# Altium PCB Signal_Integrity_4L.PcbDoc
Units mm, origin at the board's own origin, x right, y up, seen from the top; angles counter-clockwise.
Board outline 110 x 260 mm, 4 copper layers (Top Layer 1, GND1, Signal, Bottom Layer 1), stack 1.586 mm thick; 48 components, 38 nets, 216 pads, 1697 vias.
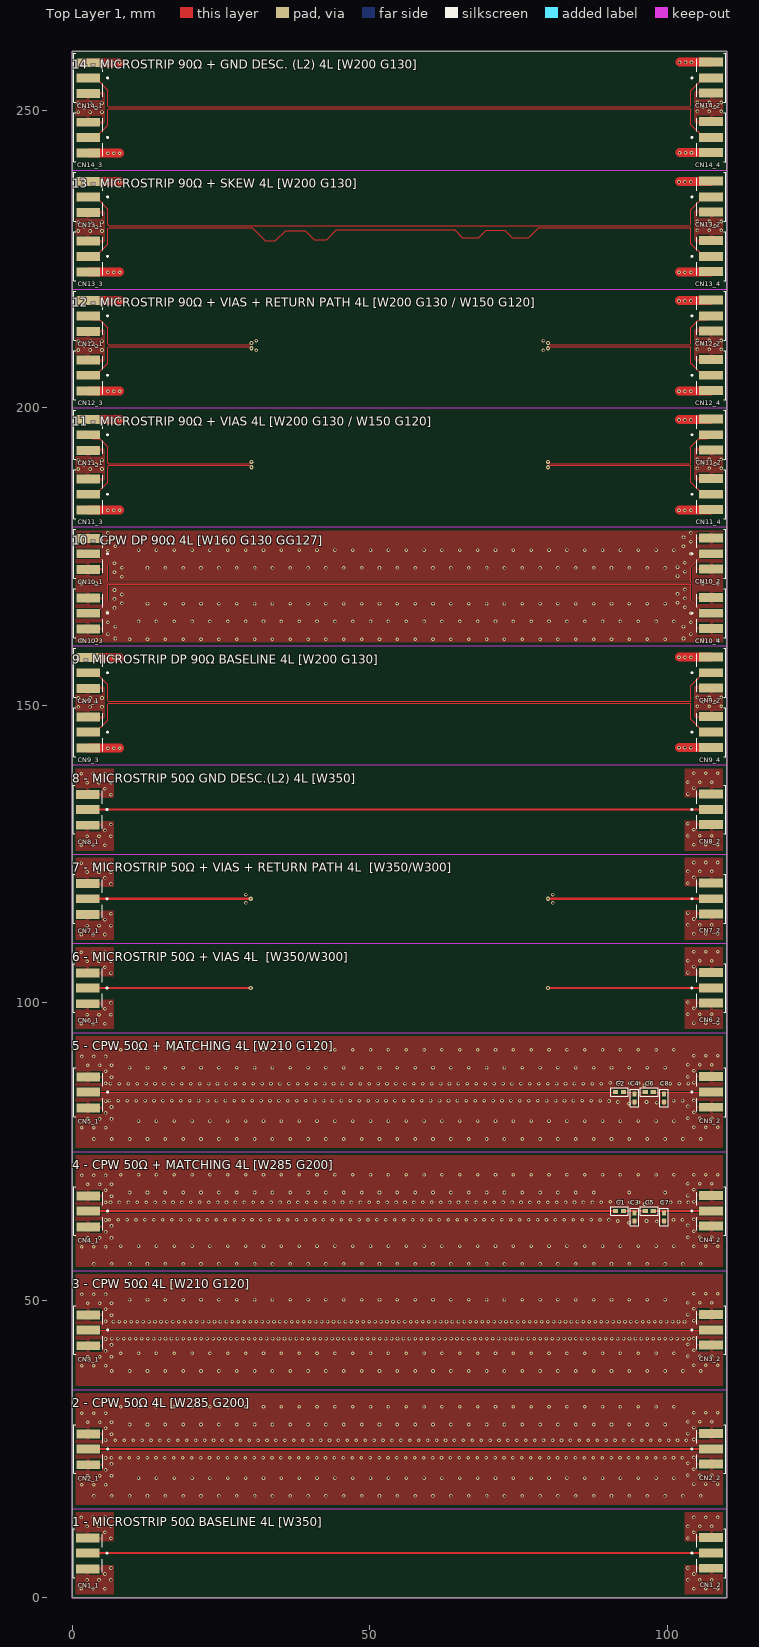
[diagram p0: Top Layer 1 view]
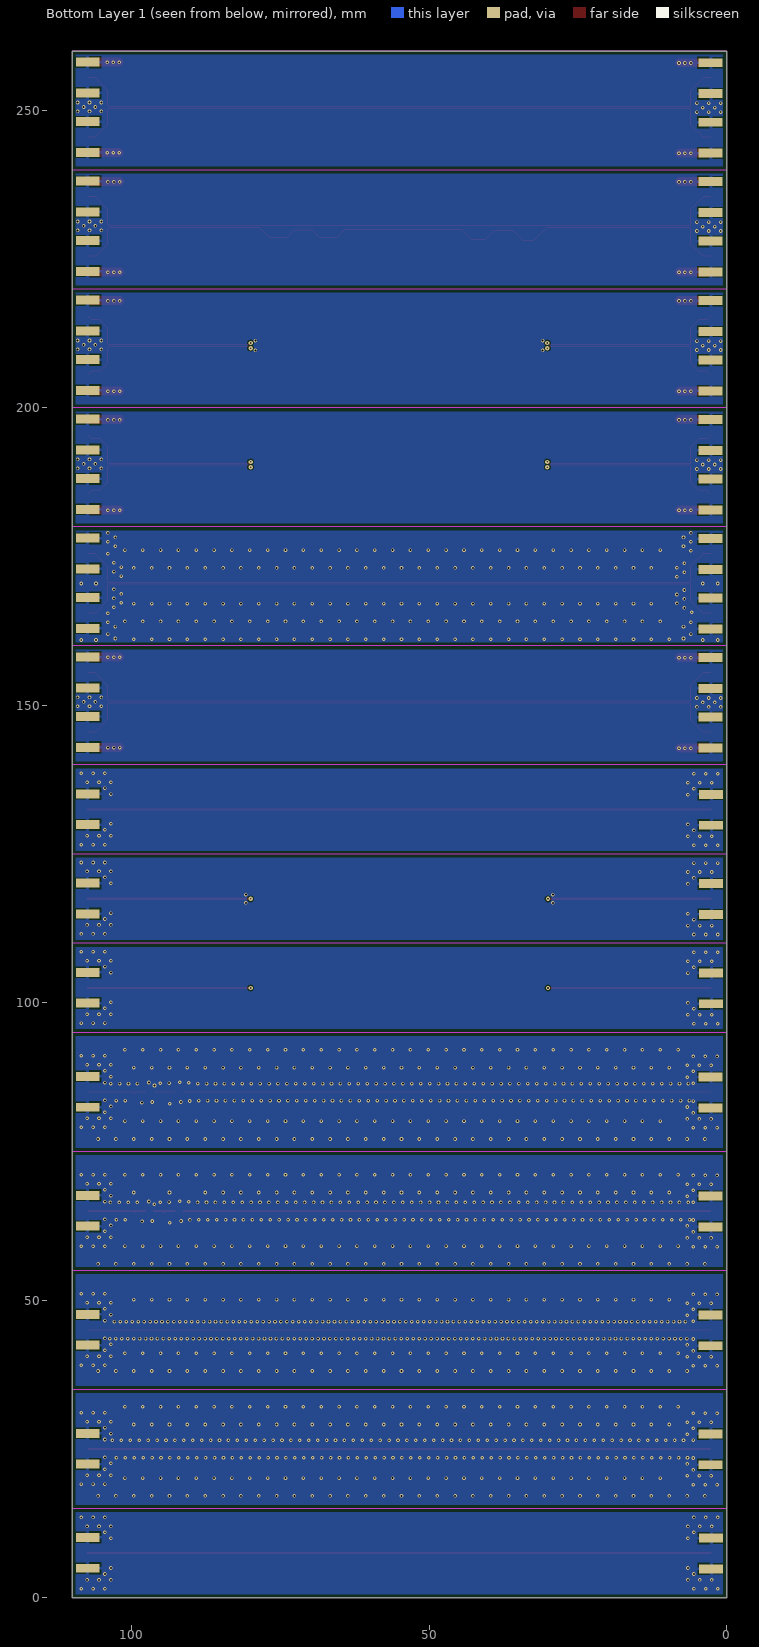
[diagram p1: Bottom Layer 1 view, seen from below]
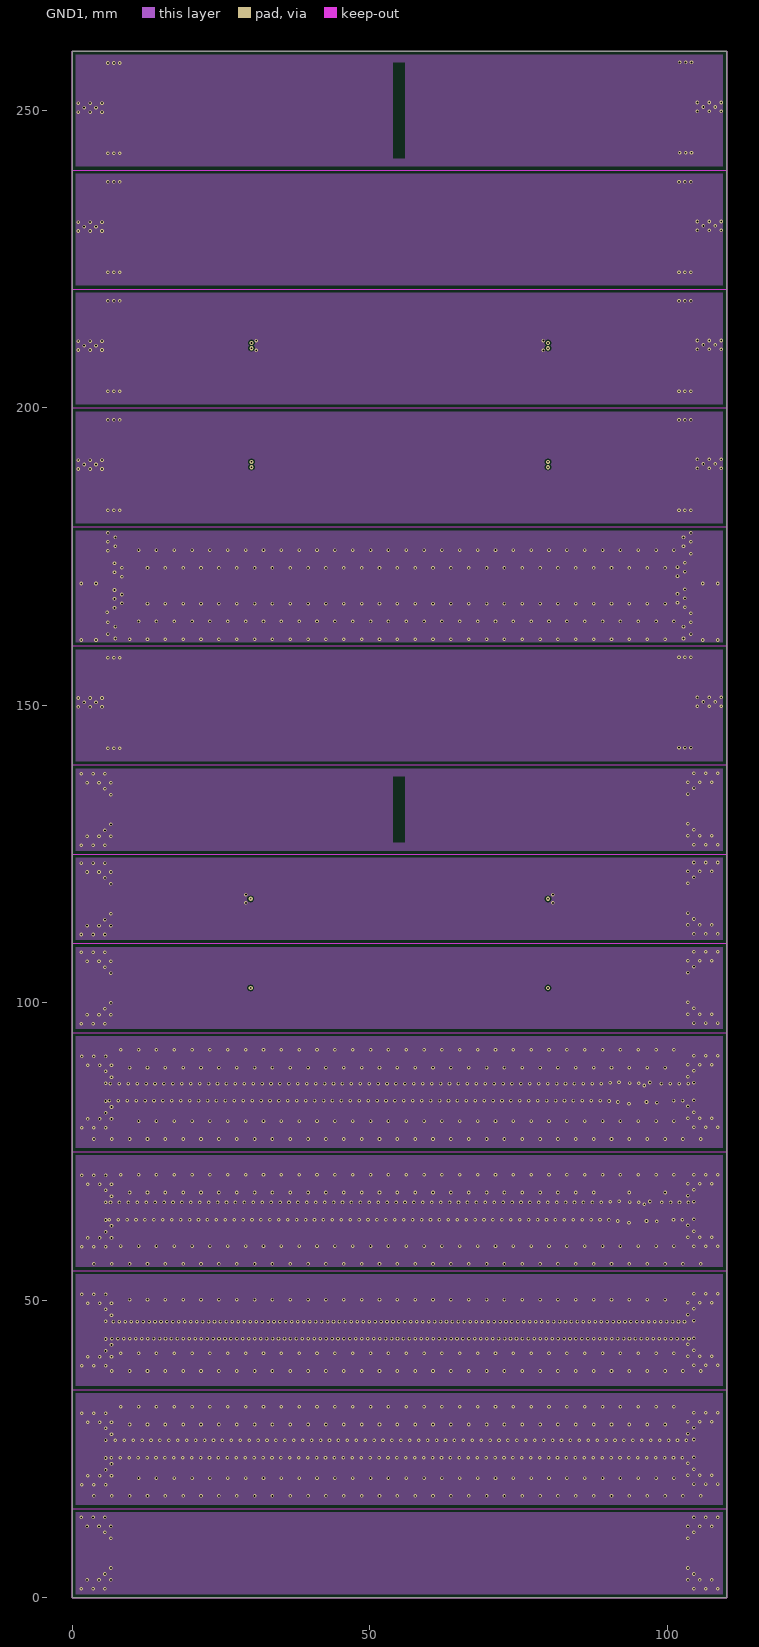
[diagram p2: GND1]
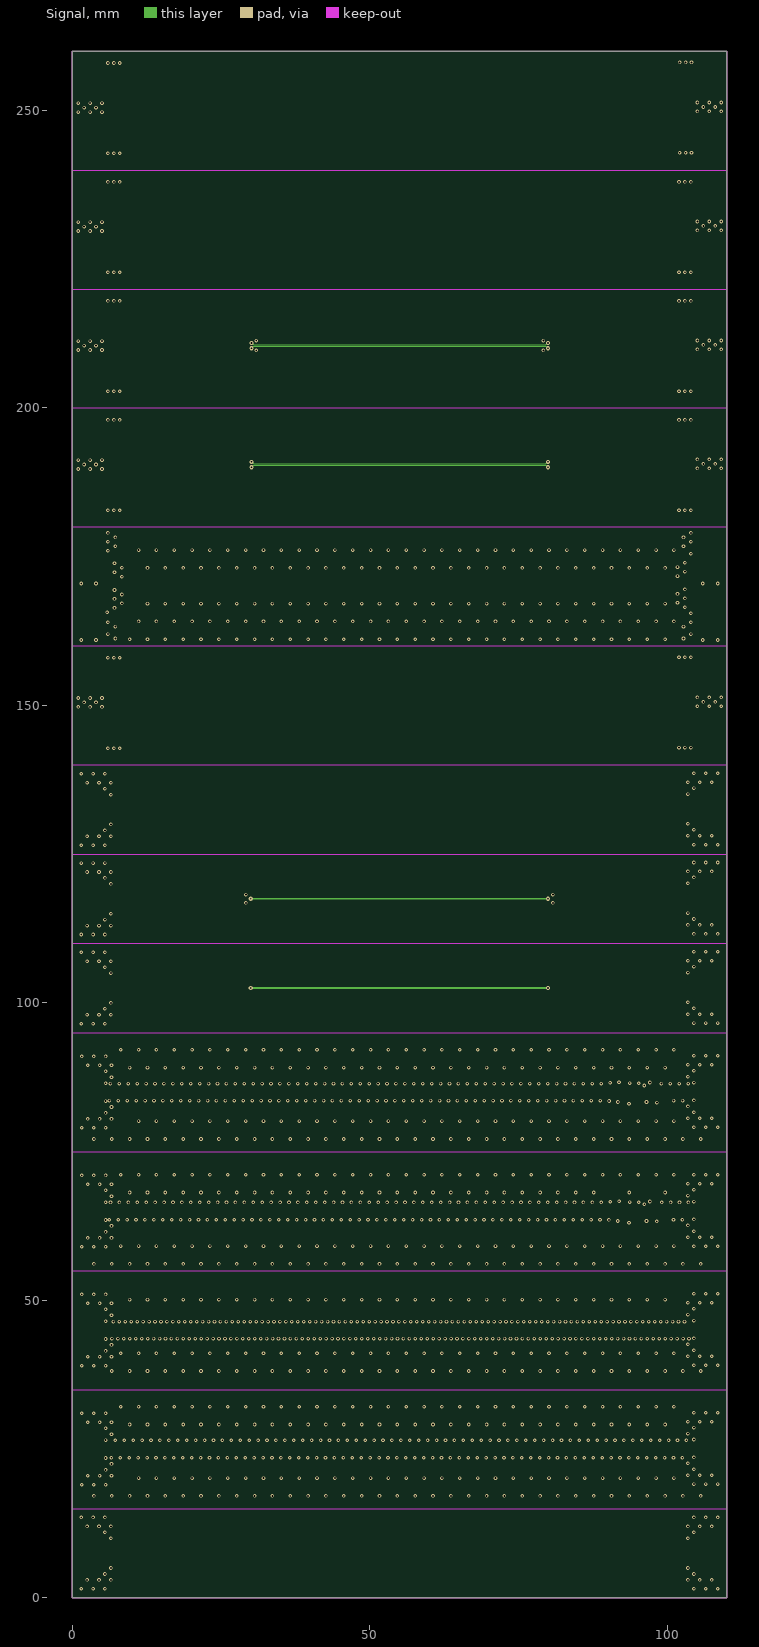
[diagram p3: Signal]
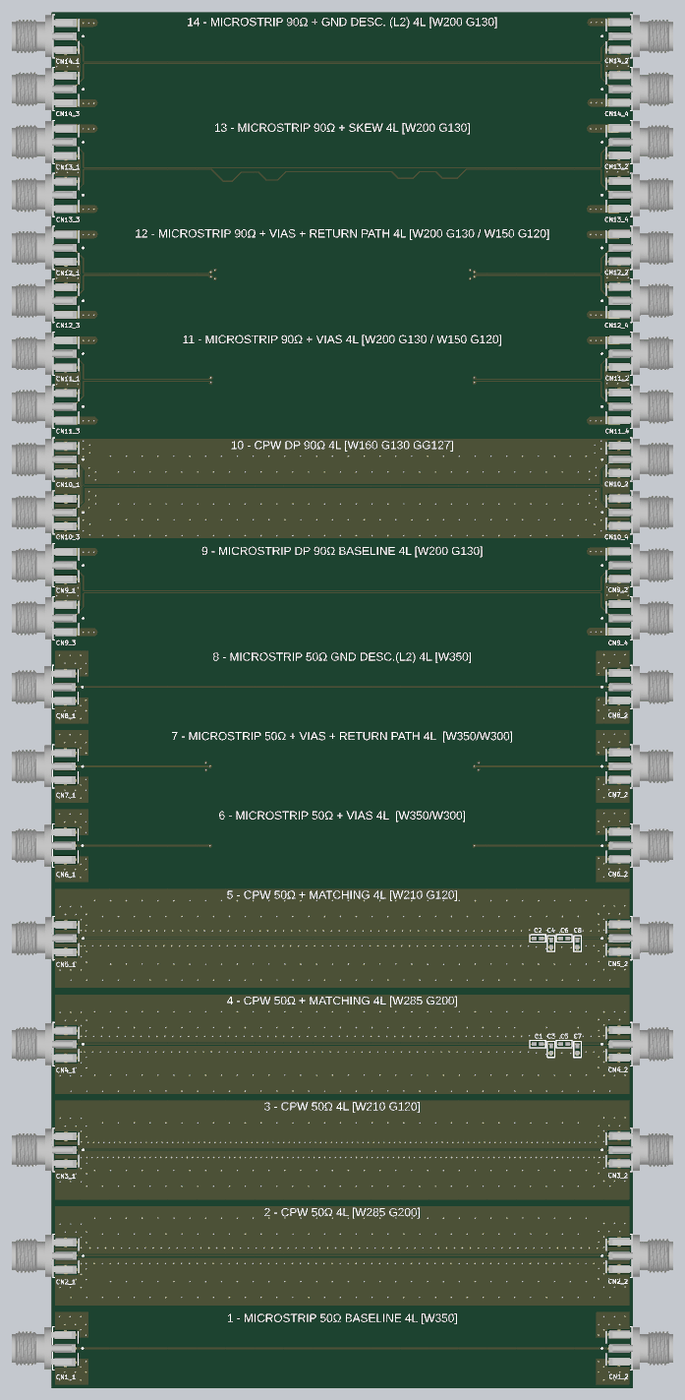
[diagram p4: 3D render of the assembled board from above, using the file's embedded part models]

## Layer stack, top to bottom
Top Solder: solder mask 0.0305, Solder Resist, Dk 3.8
Top Layer 1: signal copper 0.035
7628-1: prepreg 0.2104, PP-023, Dk 4.4
GND1: signal copper 0.0152
Dielectric 1: core 1.065, FR-4, Dk 4.6
Signal: signal copper 0.0152
7628-2: prepreg 0.2104, PP-023, Dk 4.4
Bottom Layer 1: signal copper 0.035
Bottom Solder: solder mask 0.0305, Solder Resist, Dk 3.8

## Board outline
0,0 0,260 110,260 110,0

## Design rules (kind name [scope] priority, off if disabled: settings)
Clearance Clearance_KO [OnLayer('Keep-Out Layer')] p1: gap=0.5 ignorepadtopadclearanceinfootprint=FALSE
Clearance Clearance_SC50_G120 [InNetClass('SC50_G120')] p2: gap=0.2 ignorepadtopadclearanceinfootprint=FALSE except(0.12: Arc-Fill Arc-Poly Arc-Region Track-Fill Track-Poly Track-Region)
Clearance Clearance_DP90 [InDifferentialPairClass('DP90') or InDifferentialPairClass('DPC90')] p3: gap=0.2 ignorepadtopadclearanceinfootprint=FALSE except(0.12: Arc-Arc Arc-Track Arc-Fill Arc-Poly Arc-Region Track-Track Track-Fill Track-Poly Track-Region)
Clearance [All] p4: gap=0.2 ignorepadtopadclearanceinfootprint=FALSE except(0.5: Fill-Fill Fill-Poly Fill-Region Poly-Poly Poly-Region Region-Region)
DiffPairsRouting DiffPairsRouting_DC90 [InDifferentialPairClass('DPC90')] p1: maxlimit=0.13 minlimit=0.13 mostfreqgap=0.13 toplayer_minwidth=0.16 toplayer_maxwidth=0.16 toplayer_prefwidth=0.16 midlayer1_minwidth=0.13 midlayer1_maxwidth=0.13 midlayer1_prefwidth=0.13 midlayer2_minwidth=0.13 midlayer2_maxwidth=0.13 midlayer2_prefwidth=0.13 bottomlayer_minwidth=0.16 bottomlayer_maxwidth=0.16 bottomlayer_prefwidth=0.16 impedanceprofiledriven=TRUE impedanceprofileid={4EF72ABD-D41F-48C9-AA84-232B5FCD5662} impedanceprofilevalue=90.000000 maxuncoupledlength=12.7
DiffPairsRouting DiffPairsRouting_DP90 [InDifferentialPairClass('DP90')] p2: maxlimit=0.13 minlimit=0.12 mostfreqgap=0.13 toplayer_mingap=0.13 toplayer_minwidth=0.2 toplayer_maxwidth=0.2 toplayer_prefwidth=0.2 midlayer1_maxgap=0.12 midlayer1_prefgap=0.12 midlayer1_minwidth=0.15 midlayer1_maxwidth=0.15 midlayer1_prefwidth=0.15 midlayer2_maxgap=0.12 midlayer2_prefgap=0.12 midlayer2_minwidth=0.15 midlayer2_maxwidth=0.15 midlayer2_prefwidth=0.15 bottomlayer_mingap=0.13 bottomlayer_minwidth=0.2 bottomlayer_maxwidth=0.2 bottomlayer_prefwidth=0.2 impedanceprofiledriven=TRUE impedanceprofileid={4D052417-7419-4060-914B-08419BBAABC2} impedanceprofilevalue=90.000000 maxuncoupledlength=12.7
Height [All] p1: minheight=0 maxheight=40 prefheight=12.7
HoleSize [All] p1: absolutevalues=TRUE maxlimit=5 minlimit=0.2 maxpercent=80.000 minpercent=20.000
MinimumSolderMaskSliver [All] p1: minsoldermaskwidth=0.12
PolygonConnect [All] p1: thpad.connectstyle=Relief thpad.reliefconductorwidth=0.254 thpad.reliefentries=4 thpad.polygonreliefangle="90 Angle" thpad.airgapwidth=0.254 smdpad.connectstyle=Relief smdpad.reliefconductorwidth=0.5 smdpad.reliefentries=4 smdpad.polygonreliefangle="90 Angle" smdpad.airgapwidth=0.254 via.connectstyle=Direct via.reliefconductorwidth=0.254 via.reliefentries=4 via.polygonreliefangle="90 Angle" via.airgapwidth=0.254
RoutingVias [All] p1: holewidth=0.3 width=0.6 viastyle="Through Hole" minholewidth=0.2 minwidth=0.6 maxholewidth=0.5 maxwidth=1
SilkToSilkClearance [All] p1: silktosilkclearance=0.127
SilkToSolderMaskClearance [IsPad] p1: minsilkscreentomaskgap=0.127 clearancetoexposedcopper=TRUE
SolderMaskExpansion SolderMaskExpansion_Tented [IsVia] p1: expansion=0.102 istentingtop=TRUE
SolderMaskExpansion [All] p2: expansion=0.102 istentingtop=FALSE
SupplyNets "Schematic Supply Nets_7" [InNet('GND14')] p1: voltage=0.000
SupplyNets "Schematic Supply Nets_13" [InNet('GND10')] p2: voltage=0.000
SupplyNets "Schematic Supply Nets_12" [InNet('GND13')] p3: voltage=0.000
SupplyNets "Schematic Supply Nets_11" [InNet('GND4')] p4: voltage=0.000
SupplyNets "Schematic Supply Nets_10" [InNet('GND5')] p5: voltage=0.000
SupplyNets "Schematic Supply Nets_9" [InNet('GND1')] p6: voltage=0.000
SupplyNets "Schematic Supply Nets_8" [InNet('GND3')] p7: voltage=0.000
SupplyNets "Schematic Supply Nets_6" [InNet('GND12')] p8: voltage=0.000
SupplyNets "Schematic Supply Nets_5" [InNet('GND2')] p9: voltage=0.000
SupplyNets "Schematic Supply Nets_4" [InNet('GND7')] p10: voltage=0.000
SupplyNets "Schematic Supply Nets_3" [InNet('GND11')] p11: voltage=0.000
SupplyNets "Schematic Supply Nets_2" [InNet('GND8')] p12: voltage=0.000
SupplyNets "Schematic Supply Nets_1" [InNet('GND9')] p13: voltage=0.000
SupplyNets "Schematic Supply Nets" [InNet('GND6')] p14: voltage=0.000
Width Width_S50 [InNetClass('S50')] p1: maxlimit=0.35 minlimit=0.3 preferedwidth=0.35 toplayer_minwidth=0.35 midlayer1_maxwidth=0.3 midlayer1_prefwidth=0.3 midlayer2_maxwidth=0.3 midlayer2_prefwidth=0.3 bottomlayer_minwidth=0.35 impedanceprofiledriven=TRUE impedanceprofileid={85BB407E-ACC5-421C-8E24-185C8C1FA9EB} impedanceprofilevalue=50.000000 minimp=50.000000 maximp=50.000000 favimp=50.000000
Width Width_SC50_G200 [InNetClass('SC50')] p2: maxlimit=0.285 minlimit=0.18 preferedwidth=0.285 toplayer_minwidth=0.285 bottomlayer_minwidth=0.285 impedanceprofiledriven=TRUE impedanceprofileid={B37FB097-429D-4CF1-A0C8-09DB4BF85B47} impedanceprofilevalue=50.000000 minimp=50.000000 maximp=50.000000 favimp=50.000000
Width Width_SC50_G120 [InNetClass('SC50_G120')] p3: maxlimit=0.21 minlimit=0.18 preferedwidth=0.21 toplayer_minwidth=0.21 bottomlayer_minwidth=0.21 impedanceprofiledriven=TRUE impedanceprofileid={979D10FC-C7C2-44BE-B72E-80F3B42C48E9} impedanceprofilevalue=50.000000 minimp=50.000000 maximp=50.000000 favimp=50.000000
Width [All] p4: maxlimit=3 minlimit=0.2 preferedwidth=0.2 minimp=50.000000 maximp=50.000000 favimp=50.000000
24 further rules are at their usual default settings.

## Classes and differential pairs
net class SC50_G120: CPW_G120_50OHMS CPW_G120_50OHMS_MATCH NetC2_2 NetC6_2
net class S50: MICROSTRIP_50OHMS MICROSTRIP_50OHMS_GND_DESC MICROSTRIP_50OHMS_VIAS MICROSTRIP_50OHMS_VIAS_RP
differential pair class DPC90: CPW_90OHMS
differential pair class DP90: MICROSTRIP_90OHMS MICROSTRIP_90OHMS_GND_DESC MICROSTRIP_90OHMS_SKEW MICROSTRIP_90OHMS_VIAS MICROSTRIP_90OHMS_VIAS_RP
net class SC50: CPW_G200_50OHMS CPW_G200_50OHMS_MATCH NetC1_2 NetC5_2
differential pair MICROSTRIP_90OHMS_GND_DESC: +MICROSTRIP_90OHMS_GND_DESC_P -MICROSTRIP_90OHMS_GND_DESC_N
differential pair MICROSTRIP_90OHMS_VIAS_RP: +MICROSTRIP_90OHMS_VIAS_RP_P -MICROSTRIP_90OHMS_VIAS_RP_N
differential pair MICROSTRIP_90OHMS_VIAS: +MICROSTRIP_90OHMS_VIAS_P -MICROSTRIP_90OHMS_VIAS_N
differential pair MICROSTRIP_90OHMS_SKEW: +MICROSTRIP_90OHMS_SKEW_P -MICROSTRIP_90OHMS_SKEW_N
differential pair MICROSTRIP_90OHMS: +MICROSTRIP_90OHMS_P -MICROSTRIP_90OHMS_N
differential pair CPW_90OHMS: +CPW_90OHMS_P -CPW_90OHMS_N

## Components (designator, comment, footprint, x,y, rotation, side; value= is the part's Value field where it differs from the comment)
C1 "CAP SMD 0402" 0402 92,65 r0 top
C2 "CAP SMD 0402" 0402 92,85 r0 top
C3 "CAP SMD 0402" 0402 94.5,64 r90 top
C4 "CAP SMD 0402" 0402 94.5,84 r90 top
C5 "CAP SMD 0402" 0402 97,65 r0 top
C6 "CAP SMD 0402" 0402 97,85 r0 top
C7 "CAP SMD 0402" 0402 99.5,64 r90 top
C8 "CAP SMD 0402" 0402 99.5,84 r90 top
CN1_1 "SMA-KE EDGE" "SMA-KE EDGE" 2.6,7.5 r270 top
CN1_2 "SMA-KE EDGE" "SMA-KE EDGE" 107.4,7.5 r90 top
CN2_1 "SMA-KE EDGE" "SMA-KE EDGE" 2.7,25 r270 top
CN2_2 "SMA-KE EDGE" "SMA-KE EDGE" 107.4,25 r90 top
CN3_1 "SMA-KE EDGE" "SMA-KE EDGE" 2.7,45 r270 top
CN3_2 "SMA-KE EDGE" "SMA-KE EDGE" 107.4,45 r90 top
CN4_1 "SMA-KE EDGE" "SMA-KE EDGE" 2.7,65 r270 top
CN4_2 "SMA-KE EDGE" "SMA-KE EDGE" 107.4,65 r90 top
CN5_1 "SMA-KE EDGE" "SMA-KE EDGE" 2.7,85 r270 top
CN5_2 "SMA-KE EDGE" "SMA-KE EDGE" 107.4,85 r90 top
CN6_1 "SMA-KE EDGE" "SMA-KE EDGE" 2.6,102.5 r270 top
CN6_2 "SMA-KE EDGE" "SMA-KE EDGE" 107.4,102.5 r90 top
CN7_1 "SMA-KE EDGE" "SMA-KE EDGE" 2.6,117.5 r270 top
CN7_2 "SMA-KE EDGE" "SMA-KE EDGE" 107.4,117.5 r90 top
CN8_1 "SMA-KE EDGE" "SMA-KE EDGE" 2.6,132.5 r270 top
CN8_2 "SMA-KE EDGE" "SMA-KE EDGE" 107.4,132.5 r90 top
CN9_1 "SMA-KE EDGE" "SMA-KE EDGE" 2.7,155.5 r270 top
CN9_2 "SMA-KE EDGE" "SMA-KE EDGE" 107.4,155.5 r90 top
CN9_3 "SMA-KE EDGE" "SMA-KE EDGE" 2.7,145.5 r270 top
CN9_4 "SMA-KE EDGE" "SMA-KE EDGE" 107.4,145.5 r90 top
CN10_1 "SMA-KE EDGE" "SMA-KE EDGE" 2.7,175.5 r270 top
CN10_2 "SMA-KE EDGE" "SMA-KE EDGE" 107.4,175.5 r90 top
CN10_3 "SMA-KE EDGE" "SMA-KE EDGE" 2.7,165.5 r270 top
CN10_4 "SMA-KE EDGE" "SMA-KE EDGE" 107.4,165.5 r90 top
CN11_1 "SMA-KE EDGE" "SMA-KE EDGE" 2.7,195.5 r270 top
CN11_2 "SMA-KE EDGE" "SMA-KE EDGE" 107.4,195.5 r90 top
CN11_3 "SMA-KE EDGE" "SMA-KE EDGE" 2.7,185.5 r270 top
CN11_4 "SMA-KE EDGE" "SMA-KE EDGE" 107.4,185.5 r90 top
CN12_1 "SMA-KE EDGE" "SMA-KE EDGE" 2.7,215.5 r270 top
CN12_2 "SMA-KE EDGE" "SMA-KE EDGE" 107.4,215.5 r90 top
CN12_3 "SMA-KE EDGE" "SMA-KE EDGE" 2.7,205.5 r270 top
CN12_4 "SMA-KE EDGE" "SMA-KE EDGE" 107.4,205.5 r90 top
CN13_1 "SMA-KE EDGE" "SMA-KE EDGE" 2.7,235.5 r270 top
CN13_2 "SMA-KE EDGE" "SMA-KE EDGE" 107.4,235.5 r90 top
CN13_3 "SMA-KE EDGE" "SMA-KE EDGE" 2.7,225.5 r270 top
CN13_4 "SMA-KE EDGE" "SMA-KE EDGE" 107.4,225.5 r90 top
CN14_1 "SMA-KE EDGE" "SMA-KE EDGE" 2.7,255.5 r270 top
CN14_2 "SMA-KE EDGE" "SMA-KE EDGE" 107.4,255.5 r90 top
CN14_3 "SMA-KE EDGE" "SMA-KE EDGE" 2.7,245.5 r270 top
CN14_4 "SMA-KE EDGE" "SMA-KE EDGE" 107.4,245.5 r90 top

## Footprints (in the part's own frame and the unit in brackets; to place one, negate y for a bottom-side part, rotate by r counter-clockwise, add the part's x,y. Pads: shape width x height; smd on the part's side, far side on the other; paste and mask are expansions set on the pad)
0402 [mm]
  rect 0.9x0.7 smd: 1(-0.673,0) 2(0.673,0)
  silkscreen extent -1.5,-0.7 1.5,0.7
"SMA-KE EDGE" [mm]
  rect 1.5x4 smd: 1(0,0) 2(-2.54,0) 2(2.64,0)
  rect 1.5x4 smd far side: 2(-2.54,0) 2(2.64,0)
  silkscreen extent -4.1,-2.45 4.1,3.37, body extent -3.97,-10.25 3.97,1.26, height 4.61

## Part data
C1 C2 C3 C4 C5 C6 C7 C8: "0402"
CN1_1 CN1_2 CN2_1 CN2_2 CN3_1 CN3_2 CN4_1 CN4_2 CN5_1 CN5_2 CN6_1 CN6_2 CN7_1 CN7_2 CN8_1 CN8_2 CN9_1 CN9_2 CN9_3 CN9_4 CN10_1 CN10_2 CN10_3 CN10_4 CN11_1 CN11_2 CN11_3 CN11_4 CN12_1 CN12_2 CN12_3 CN12_4 CN13_1 CN13_2 CN13_3 CN13_4 CN14_1 CN14_2 CN14_3 CN14_4: "SMA Connector Receptacle, Female Socket 50Ohm Board Edge, End Launch Solder", Manufacturer_Name="TE Connectivity", Manufacturer_Part_Number=CONSMA020.062-G, Mouser Part Number=712-CONSMA020.062-G, Datasheet Link=https://componentsearchengine.com/Datasheets/1/CONSMA020.062-G.pdf, Geometry.Height=7.92mm, Mouser Price/Stock=https://www.mouser.co.uk/ProductDetail/Linx-Technologies/CONSMA020.062-G?qs=xZ%2FP%252Ba9zWqa7zEs9%2FuMaNQ%3D%3D

## Via types
v1: diameter 0.6, hole 0.3, Top Layer 1 to Bottom Layer 1, tented both sides, 1685 vias
v2: diameter 0.7, hole 0.3, Top Layer 1 to Bottom Layer 1, tented both sides, 12 vias

## Nets (pads, with @x,y where several pads share a name; then routed paths per layer and width w, separated by ;. In a path a pad name is that pad's centre, name@x,y a point inside that pad or via, vN(x,y) a via of type N, cw(c..) or ccw(c..) an arc to the next point about the centre after c; other vN are vias at no path point)
CPW_90OHMS_N: CN10_3.1 CN10_4.1 | length 111.8
  Top Layer 1 w0.16: CN10_3.1 3.95,165.5 6,167.55 6,170.261 6.094,170.355 102.545,170.355 103.906,170.355 104,170.261 104,167.65 106.15,165.5 CN10_4.1
CPW_90OHMS_P: CN10_1.1 CN10_2.1 | length 111.8
  Top Layer 1 w0.16: CN10_1.1 3.95,175.5 6,173.45 6,170.739 6.094,170.645 102.665,170.645 103.906,170.645 104,170.739 104,173.35 106.15,175.5 CN10_2.1
CPW_G120_50OHMS: CN3_1.1 CN3_2.1 | length 104.7
  Top Layer 1 w0.21: CN3_1.1 CN3_2.1
CPW_G120_50OHMS_MATCH: C2.1 CN5_1.1 | length 88.6
  Top Layer 1 w0.21: CN5_1.1 C2.1
CPW_G200_50OHMS: CN2_1.1 CN2_2.1 | length 104.7
  Top Layer 1 w0.285: CN2_1.1 CN2_2.1
CPW_G200_50OHMS_MATCH: C1.1 CN4_1.1 | length 88.6
  Top Layer 1 w0.285: CN4_1.1 C1.1
GND1: CN1_1.2 CN1_2.2
  other v1: 1.5,1.5 3.5,1.5 5.5,1.5 104.5,1.5 106.5,1.5 108.5,1.5 2.5,3 4.5,3 6.5,3 103.5,3 105.5,3 107.5,3 5.5,4 104.5,4 6.5,5 103.5,5 6.5,10 103.5,10 5.5,11 104.5,11 2.5,12 4.5,12 6.5,12 103.5,12 105.5,12 107.5,12 1.5,13.5 3.5,13.5 5.5,13.5 104.5,13.5 106.5,13.5 108.5,13.5
GND2: CN2_1.2 CN2_2.2
  other v1: 3.65,17.121 6.65,17.121 9.65,17.121 12.65,17.121 15.65,17.121 18.65,17.121 21.65,17.121 24.65,17.121 27.65,17.121 30.65,17.121 33.65,17.121 36.65,17.121 39.65,17.121 42.65,17.121 45.65,17.121 48.65,17.121 51.65,17.121 54.65,17.121 57.65,17.121 60.65,17.121 63.65,17.121 66.65,17.121 69.65,17.121 72.65,17.121 75.65,17.121 78.65,17.121 81.65,17.121 84.65,17.121 87.65,17.121 90.65,17.121 93.65,17.121 96.65,17.121 99.65,17.121 102.65,17.121 105.65,17.121 1.6,19 3.6,19 5.6,19 104.5,19.1 106.5,19.1 108.5,19.1 11.15,20.121 14.15,20.121 17.15,20.121 20.15,20.121 23.15,20.121 26.15,20.121 29.15,20.121 32.15,20.121 35.15,20.121 38.15,20.121 41.15,20.121 44.15,20.121 47.15,20.121 50.15,20.121 53.15,20.121 56.15,20.121 59.15,20.121 62.15,20.121 65.15,20.121 68.15,20.121 71.15,20.121 74.15,20.121 77.15,20.121 80.15,20.121 83.15,20.121 86.15,20.121 89.15,20.121 92.15,20.121 95.15,20.121 98.15,20.121 101.15,20.121 2.6,20.5 4.6,20.5 6.6,20.5 103.5,20.6 105.5,20.6 107.5,20.6 5.6,21.5 104.5,21.6 6.6,22.5 103.5,22.6 5.6,23.5 6.578,23.535 8.078,23.535 9.578,23.535 11.078,23.535 12.578,23.535 14.078,23.535 15.578,23.535 17.078,23.535 18.578,23.535 20.078,23.535 21.578,23.535 23.078,23.535 24.578,23.535 26.078,23.535 27.578,23.535 29.078,23.535 30.578,23.535 32.078,23.535 33.578,23.535 35.078,23.535 36.578,23.535 38.078,23.535 39.578,23.535 41.078,23.535 42.578,23.535 44.078,23.535 45.578,23.535 47.078,23.535 48.578,23.535 50.078,23.535 51.578,23.535 53.078,23.535 54.578,23.535 56.078,23.535 57.578,23.535 59.078,23.535 60.578,23.535 62.078,23.535 63.578,23.535 65.078,23.535 66.578,23.535 68.078,23.535 69.578,23.535 71.078,23.535 72.578,23.535 74.078,23.535 75.578,23.535 77.078,23.535 78.578,23.535 80.078,23.535 81.578,23.535 83.078,23.535 84.578,23.535 86.078,23.535 87.578,23.535 89.078,23.535 90.578,23.535 92.078,23.535 93.578,23.535 95.078,23.535 96.578,23.535 98.078,23.535 99.578,23.535 101.078,23.535 102.578,23.535 104.5,23.6 7.243,26.465 8.743,26.465 10.243,26.465 11.743,26.465 13.243,26.465 14.743,26.465 16.243,26.465 17.743,26.465 19.243,26.465 20.743,26.465 22.243,26.465 23.743,26.465 25.243,26.465 26.743,26.465 28.243,26.465 29.743,26.465 31.243,26.465 32.743,26.465 34.243,26.465 35.743,26.465 37.243,26.465 38.743,26.465 40.243,26.465 41.743,26.465 43.243,26.465 44.743,26.465 46.243,26.465 47.743,26.465 49.243,26.465 50.743,26.465 52.243,26.465 53.743,26.465 55.243,26.465 56.743,26.465 58.243,26.465 59.743,26.465 61.243,26.465 62.743,26.465 64.243,26.465 65.743,26.465 67.243,26.465 68.743,26.465 70.243,26.465 71.743,26.465 73.243,26.465 74.743,26.465 76.243,26.465 77.743,26.465 79.243,26.465 80.743,26.465 82.243,26.465 83.743,26.465 85.243,26.465 86.743,26.465 88.243,26.465 89.743,26.465 91.243,26.465 92.743,26.465 94.243,26.465 95.743,26.465 97.243,26.465 98.743,26.465 100.243,26.465 101.743,26.465 103.243,26.465 5.6,26.5 104.5,26.6 6.6,27.5 103.5,27.6 5.6,28.5 104.5,28.6 9.65,29.121 12.65,29.121 15.65,29.121 18.65,29.121 21.65,29.121 24.65,29.121 27.65,29.121 30.65,29.121 33.65,29.121 36.65,29.121 39.65,29.121 42.65,29.121 45.65,29.121 48.65,29.121 51.65,29.121 54.65,29.121 57.65,29.121 60.65,29.121 63.65,29.121 66.65,29.121 69.65,29.121 72.65,29.121 75.65,29.121 78.65,29.121 81.65,29.121 84.65,29.121 87.65,29.121 90.65,29.121 93.65,29.121 96.65,29.121 99.65,29.121 2.6,29.5 4.6,29.5 6.6,29.5 103.5,29.6 105.5,29.6 107.5,29.6 1.6,31 3.6,31 5.6,31 104.5,31.1 106.5,31.1 108.5,31.1 8.15,32.121 11.15,32.121 14.15,32.121 17.15,32.121 20.15,32.121 23.15,32.121 26.15,32.121 29.15,32.121 32.15,32.121 35.15,32.121 38.15,32.121 41.15,32.121 44.15,32.121 47.15,32.121 50.15,32.121 53.15,32.121 56.15,32.121 59.15,32.121 62.15,32.121 65.15,32.121 68.15,32.121 71.15,32.121 74.15,32.121 77.15,32.121 80.15,32.121 83.15,32.121 86.15,32.121 89.15,32.121 92.15,32.121 95.15,32.121 98.15,32.121 101.15,32.121
GND3: CN3_1.2 CN3_2.2
  other v1: 6.65,38.121 9.65,38.121 12.65,38.121 15.65,38.121 18.65,38.121 21.65,38.121 24.65,38.121 27.65,38.121 30.65,38.121 33.65,38.121 36.65,38.121 39.65,38.121 42.65,38.121 45.65,38.121 48.65,38.121 51.65,38.121 54.65,38.121 57.65,38.121 60.65,38.121 63.65,38.121 66.65,38.121 69.65,38.121 72.65,38.121 75.65,38.121 78.65,38.121 81.65,38.121 84.65,38.121 87.65,38.121 90.65,38.121 93.65,38.121 96.65,38.121 99.65,38.121 102.65,38.121 105.65,38.121 1.6,39 3.6,39 5.6,39 104.5,39.1 106.5,39.1 108.5,39.1 2.6,40.5 4.6,40.5 6.6,40.5 103.5,40.6 105.5,40.6 107.5,40.6 8.15,41.121 11.15,41.121 14.15,41.121 17.15,41.121 20.15,41.121 23.15,41.121 26.15,41.121 29.15,41.121 32.15,41.121 35.15,41.121 38.15,41.121 41.15,41.121 44.15,41.121 47.15,41.121 50.15,41.121 53.15,41.121 56.15,41.121 59.15,41.121 62.15,41.121 65.15,41.121 68.15,41.121 71.15,41.121 74.15,41.121 77.15,41.121 80.15,41.121 83.15,41.121 86.15,41.121 89.15,41.121 92.15,41.121 95.15,41.121 98.15,41.121 101.15,41.121 5.6,41.5 104.5,41.6 6.6,42.5 103.5,42.6 5.6,43.5 6.676,43.575 7.676,43.575 8.676,43.575 9.676,43.575 10.676,43.575 11.676,43.575 12.676,43.575 13.676,43.575 14.676,43.575 15.676,43.575 16.676,43.575 17.676,43.575 18.676,43.575 19.676,43.575 20.676,43.575 21.676,43.575 22.676,43.575 23.676,43.575 24.676,43.575 25.676,43.575 26.676,43.575 27.676,43.575 28.676,43.575 29.676,43.575 30.676,43.575 31.676,43.575 32.676,43.575 33.676,43.575 34.676,43.575 35.676,43.575 36.676,43.575 37.676,43.575 38.676,43.575 39.676,43.575 40.676,43.575 41.676,43.575 42.676,43.575 43.676,43.575 44.676,43.575 45.676,43.575 46.676,43.575 47.676,43.575 48.676,43.575 49.676,43.575 50.676,43.575 51.676,43.575 52.676,43.575 53.676,43.575 54.676,43.575 55.676,43.575 56.676,43.575 57.676,43.575 58.676,43.575 59.676,43.575 60.676,43.575 61.676,43.575 62.676,43.575 63.676,43.575 64.676,43.575 65.676,43.575 66.676,43.575 67.676,43.575 68.676,43.575 69.676,43.575 70.676,43.575 71.676,43.575 72.676,43.575 73.676,43.575 74.676,43.575 75.676,43.575 76.676,43.575 77.676,43.575 78.676,43.575 79.676,43.575 80.676,43.575 81.676,43.575 82.676,43.575 83.676,43.575 84.676,43.575 85.676,43.575 86.676,43.575 87.676,43.575 88.676,43.575 89.676,43.575 90.676,43.575 91.676,43.575 92.676,43.575 93.676,43.575 94.676,43.575 95.676,43.575 96.676,43.575 97.676,43.575 98.676,43.575 99.676,43.575 100.676,43.575 101.676,43.575 102.676,43.575 103.676,43.575 104.5,43.6 6.916,46.425 7.916,46.425 8.916,46.425 9.916,46.425 10.916,46.425 11.916,46.425 12.916,46.425 13.916,46.425 14.916,46.425 15.916,46.425 16.916,46.425 17.916,46.425 18.916,46.425 19.916,46.425 20.916,46.425 21.916,46.425 22.916,46.425 23.916,46.425 24.916,46.425 25.916,46.425 26.916,46.425 27.916,46.425 28.916,46.425 29.916,46.425 30.916,46.425 31.916,46.425 32.916,46.425 33.916,46.425 34.916,46.425 35.916,46.425 36.916,46.425 37.916,46.425 38.916,46.425 39.916,46.425 40.916,46.425 41.916,46.425 42.916,46.425 43.916,46.425 44.916,46.425 45.916,46.425 46.916,46.425 47.916,46.425 48.916,46.425 49.916,46.425 50.916,46.425 51.916,46.425 52.916,46.425 53.916,46.425 54.916,46.425 55.916,46.425 56.916,46.425 57.916,46.425 58.916,46.425 59.916,46.425 60.916,46.425 61.916,46.425 62.916,46.425 63.916,46.425 64.916,46.425 65.916,46.425 66.916,46.425 67.916,46.425 68.916,46.425 69.916,46.425 70.916,46.425 71.916,46.425 72.916,46.425 73.916,46.425 74.916,46.425 75.916,46.425 76.916,46.425 77.916,46.425 78.916,46.425 79.916,46.425 80.916,46.425 81.916,46.425 82.916,46.425 83.916,46.425 84.916,46.425 85.916,46.425 86.916,46.425 87.916,46.425 88.916,46.425 89.916,46.425 90.916,46.425 91.916,46.425 92.916,46.425 93.916,46.425 94.916,46.425 95.916,46.425 96.916,46.425 97.916,46.425 98.916,46.425 99.916,46.425 100.916,46.425 101.916,46.425 102.916,46.425 5.6,46.5 104.5,46.6 6.6,47.5 103.5,47.6 5.6,48.5 104.5,48.6 2.6,49.5 4.6,49.5 6.6,49.5 103.5,49.6 105.5,49.6 107.5,49.6 9.65,50.121 12.65,50.121 15.65,50.121 18.65,50.121 21.65,50.121 24.65,50.121 27.65,50.121 30.65,50.121 33.65,50.121 36.65,50.121 39.65,50.121 42.65,50.121 45.65,50.121 48.65,50.121 51.65,50.121 54.65,50.121 57.65,50.121 60.65,50.121 63.65,50.121 66.65,50.121 69.65,50.121 72.65,50.121 75.65,50.121 78.65,50.121 81.65,50.121 84.65,50.121 87.65,50.121 90.65,50.121 93.65,50.121 96.65,50.121 99.65,50.121 1.6,51 3.6,51 5.6,51 104.5,51.1 106.5,51.1 108.5,51.1
GND4: C3.1 C7.1 CN4_1.2 CN4_2.2
  other v1: 3.65,56.121 6.65,56.121 9.65,56.121 12.65,56.121 15.65,56.121 18.65,56.121 21.65,56.121 24.65,56.121 27.65,56.121 30.65,56.121 33.65,56.121 36.65,56.121 39.65,56.121 42.65,56.121 45.65,56.121 48.65,56.121 51.65,56.121 54.65,56.121 57.65,56.121 60.65,56.121 63.65,56.121 66.65,56.121 69.65,56.121 72.65,56.121 75.65,56.121 78.65,56.121 81.65,56.121 84.65,56.121 87.65,56.121 90.65,56.121 93.65,56.121 96.65,56.121 99.65,56.121 102.65,56.121 105.65,56.121 1.6,59 3.6,59 5.6,59 104.5,59.1 106.5,59.1 108.5,59.1 8.15,59.121 11.15,59.121 14.15,59.121 17.15,59.121 20.15,59.121 23.15,59.121 26.15,59.121 29.15,59.121 32.15,59.121 35.15,59.121 38.15,59.121 41.15,59.121 44.15,59.121 47.15,59.121 50.15,59.121 53.15,59.121 56.15,59.121 59.15,59.121 62.15,59.121 65.15,59.121 68.15,59.121 71.15,59.121 74.15,59.121 77.15,59.121 80.15,59.121 83.15,59.121 86.15,59.121 89.15,59.121 92.15,59.121 95.15,59.121 98.15,59.121 101.15,59.121 2.6,60.5 4.6,60.5 6.6,60.5 103.5,60.6 105.5,60.6 107.5,60.6 5.6,61.5 104.5,61.6 6.6,62.5 103.5,62.6 93.592,63.047 98.256,63.27 91.711,63.339 96.536,63.339 5.6,63.5 90.221,63.515 6.221,63.535 7.721,63.535 9.221,63.535 10.721,63.535 12.221,63.535 13.721,63.535 15.221,63.535 16.721,63.535 18.221,63.535 19.721,63.535 21.221,63.535 22.721,63.535 24.221,63.535 25.721,63.535 27.221,63.535 28.721,63.535 30.221,63.535 31.721,63.535 33.221,63.535 34.721,63.535 36.221,63.535 37.721,63.535 39.221,63.535 40.721,63.535 42.221,63.535 43.721,63.535 45.221,63.535 46.721,63.535 48.221,63.535 49.721,63.535 51.221,63.535 52.721,63.535 54.221,63.535 55.721,63.535 57.221,63.535 58.721,63.535 60.221,63.535 61.721,63.535 63.221,63.535 64.721,63.535 66.221,63.535 67.721,63.535 69.221,63.535 70.721,63.535 72.221,63.535 73.721,63.535 75.221,63.535 76.721,63.535 78.221,63.535 79.721,63.535 81.221,63.535 82.721,63.535 84.221,63.535 85.721,63.535 87.221,63.535 88.721,63.535 101.078,63.535 102.578,63.535 104.5,63.6 96.191,66.14 6.434,66.465 7.934,66.465 9.434,66.465 10.934,66.465 12.434,66.465 13.934,66.465 15.434,66.465 16.934,66.465 18.434,66.465 19.934,66.465 21.434,66.465 22.934,66.465 24.434,66.465 25.934,66.465 27.434,66.465 28.934,66.465 30.434,66.465 31.934,66.465 33.434,66.465 34.934,66.465 36.434,66.465 37.934,66.465 39.434,66.465 40.934,66.465 42.434,66.465 43.934,66.465 45.434,66.465 46.934,66.465 48.434,66.465 49.934,66.465 51.434,66.465 52.934,66.465 54.434,66.465 55.934,66.465 57.434,66.465 58.934,66.465 60.434,66.465 61.934,66.465 63.434,66.465 64.934,66.465 66.434,66.465 67.934,66.465 69.434,66.465 70.934,66.465 72.434,66.465 73.934,66.465 75.434,66.465 76.934,66.465 78.434,66.465 79.934,66.465 81.434,66.465 82.934,66.465 84.434,66.465 85.934,66.465 87.434,66.465 88.934,66.465 99.084,66.465 100.584,66.465 102.084,66.465 103.584,66.465 95.222,66.486 5.6,66.5 93.722,66.509 90.431,66.572 104.5,66.6 97.116,66.617 91.929,66.641 6.6,67.5 103.5,67.6 9.65,68.121 12.65,68.121 15.65,68.121 18.65,68.121 21.65,68.121 24.65,68.121 27.65,68.121 30.65,68.121 33.65,68.121 36.65,68.121 39.65,68.121 42.65,68.121 45.65,68.121 48.65,68.121 51.65,68.121 54.65,68.121 57.65,68.121 60.65,68.121 63.65,68.121 66.65,68.121 69.65,68.121 72.65,68.121 75.65,68.121 78.65,68.121 81.65,68.121 84.65,68.121 87.65,68.121 93.65,68.121 99.65,68.121 5.6,68.5 104.5,68.6 2.6,69.5 4.6,69.5 6.6,69.5 103.5,69.6 105.5,69.6 107.5,69.6 1.6,71 3.6,71 5.6,71 8.15,71.121 11.15,71.121 14.15,71.121 17.15,71.121 20.15,71.121 23.15,71.121 26.15,71.121 29.15,71.121 32.15,71.121 35.15,71.121 38.15,71.121 41.15,71.121 44.15,71.121 47.15,71.121 50.15,71.121 53.15,71.121 56.15,71.121 59.15,71.121 62.15,71.121 65.15,71.121 68.15,71.121 71.15,71.121 74.15,71.121 77.15,71.121 80.15,71.121 83.15,71.121 86.15,71.121 89.15,71.121 92.15,71.121 95.15,71.121 98.15,71.121 101.15,71.121 104.5,71.1 106.5,71.1 108.5,71.1
GND5: C4.1 C8.1 CN5_1.2 CN5_2.2
  other v1: 3.65,77.121 6.65,77.121 9.65,77.121 12.65,77.121 15.65,77.121 18.65,77.121 21.65,77.121 24.65,77.121 27.65,77.121 30.65,77.121 33.65,77.121 36.65,77.121 39.65,77.121 42.65,77.121 45.65,77.121 48.65,77.121 51.65,77.121 54.65,77.121 57.65,77.121 60.65,77.121 63.65,77.121 66.65,77.121 69.65,77.121 72.65,77.121 75.65,77.121 78.65,77.121 81.65,77.121 84.65,77.121 87.65,77.121 90.65,77.121 93.65,77.121 96.65,77.121 99.65,77.121 102.65,77.121 105.65,77.121 1.6,79 3.6,79 5.6,79 104.5,79.1 106.5,79.1 108.5,79.1 11.15,80.121 14.15,80.121 17.15,80.121 20.15,80.121 23.15,80.121 26.15,80.121 29.15,80.121 32.15,80.121 35.15,80.121 38.15,80.121 41.15,80.121 44.15,80.121 47.15,80.121 50.15,80.121 53.15,80.121 56.15,80.121 59.15,80.121 62.15,80.121 65.15,80.121 68.15,80.121 71.15,80.121 74.15,80.121 77.15,80.121 80.15,80.121 83.15,80.121 86.15,80.121 89.15,80.121 92.15,80.121 95.15,80.121 98.15,80.121 101.15,80.121 2.6,80.5 4.6,80.5 6.6,80.5 103.5,80.6 105.5,80.6 107.5,80.6 5.6,81.5 104.5,81.6 6.6,82.5 103.5,82.6 93.592,83.047 98.288,83.246 91.734,83.339 96.536,83.339 5.6,83.5 90.243,83.505 6.244,83.575 7.744,83.575 9.244,83.575 10.744,83.575 12.244,83.575 13.744,83.575 15.244,83.575 16.744,83.575 18.244,83.575 19.744,83.575 21.244,83.575 22.744,83.575 24.244,83.575 25.744,83.575 27.244,83.575 28.744,83.575 30.244,83.575 31.744,83.575 33.244,83.575 34.744,83.575 36.244,83.575 37.744,83.575 39.244,83.575 40.744,83.575 42.244,83.575 43.744,83.575 45.244,83.575 46.744,83.575 48.244,83.575 49.744,83.575 51.244,83.575 52.744,83.575 54.244,83.575 55.744,83.575 57.244,83.575 58.744,83.575 60.244,83.575 61.744,83.575 63.244,83.575 64.744,83.575 66.244,83.575 67.744,83.575 69.244,83.575 70.744,83.575 72.244,83.575 73.744,83.575 75.244,83.575 76.744,83.575 78.244,83.575 79.744,83.575 81.244,83.575 82.744,83.575 84.244,83.575 85.744,83.575 87.244,83.575 88.744,83.575 101.096,83.575 102.596,83.575 104.5,83.6 96.167,86.109 6.418,86.425 7.918,86.425 9.418,86.425 10.918,86.425 12.418,86.425 13.918,86.425 15.418,86.425 16.918,86.425 18.418,86.425 19.918,86.425 21.418,86.425 22.918,86.425 24.418,86.425 25.918,86.425 27.418,86.425 28.918,86.425 30.418,86.425 31.918,86.425 33.418,86.425 34.918,86.425 36.418,86.425 37.918,86.425 39.418,86.425 40.918,86.425 42.418,86.425 43.918,86.425 45.418,86.425 46.918,86.425 48.418,86.425 49.918,86.425 51.418,86.425 52.918,86.425 54.418,86.425 55.918,86.425 57.418,86.425 58.918,86.425 60.418,86.425 61.918,86.425 63.418,86.425 64.918,86.425 66.418,86.425 67.918,86.425 69.418,86.425 70.918,86.425 72.418,86.425 73.918,86.425 75.418,86.425 76.918,86.425 78.418,86.425 79.918,86.425 81.418,86.425 82.918,86.425 84.418,86.425 85.918,86.425 87.418,86.425 88.918,86.425 99.043,86.425 100.543,86.425 102.043,86.425 103.543,86.425 95.222,86.486 5.6,86.5 93.722,86.509 90.411,86.564 104.5,86.6 97.116,86.616 91.909,86.644 6.6,87.5 103.5,87.6 5.6,88.5 104.5,88.6 9.65,89.121 12.65,89.121 15.65,89.121 18.65,89.121 21.65,89.121 24.65,89.121 27.65,89.121 30.65,89.121 33.65,89.121 36.65,89.121 39.65,89.121 42.65,89.121 45.65,89.121 48.65,89.121 51.65,89.121 54.65,89.121 57.65,89.121 60.65,89.121 63.65,89.121 66.65,89.121 69.65,89.121 72.65,89.121 75.65,89.121 78.65,89.121 81.65,89.121 84.65,89.121 87.65,89.121 90.65,89.121 93.65,89.121 96.65,89.121 99.65,89.121 2.6,89.5 4.6,89.5 6.6,89.5 103.5,89.6 105.5,89.6 107.5,89.6 1.6,91 3.6,91 5.6,91 104.5,91.1 106.5,91.1 108.5,91.1 8.15,92.121 11.15,92.121 14.15,92.121 17.15,92.121 20.15,92.121 23.15,92.121 26.15,92.121 29.15,92.121 32.15,92.121 35.15,92.121 38.15,92.121 41.15,92.121 44.15,92.121 47.15,92.121 50.15,92.121 53.15,92.121 56.15,92.121 59.15,92.121 62.15,92.121 65.15,92.121 68.15,92.121 71.15,92.121 74.15,92.121 77.15,92.121 80.15,92.121 83.15,92.121 86.15,92.121 89.15,92.121 92.15,92.121 95.15,92.121 98.15,92.121 101.15,92.121
GND6: CN6_1.2 CN6_2.2
  other v1: 1.5,96.5 3.5,96.5 5.5,96.5 104.5,96.6 106.5,96.6 108.5,96.6 2.5,98 4.5,98 6.5,98 103.5,98.1 105.5,98.1 107.5,98.1 5.5,99 104.5,99.1 6.5,100 103.5,100.1 6.5,105 103.5,105.1 5.5,106 104.5,106.1 2.5,107 4.5,107 6.5,107 103.5,107.1 105.5,107.1 107.5,107.1 1.5,108.5 3.5,108.5 5.5,108.5 104.5,108.6 106.5,108.6 108.5,108.6
GND7: CN7_1.2 CN7_2.2
  other v1: 1.5,111.5 3.5,111.5 5.5,111.5 104.5,111.6 106.5,111.6 108.5,111.6 2.5,113 4.5,113 6.5,113 103.5,113.1 105.5,113.1 107.5,113.1 5.5,114 104.5,114.1 6.5,115 103.5,115.1 29.2,116.8 80.8,116.8 29.2,118.2 80.8,118.2 6.5,120 103.5,120.1 5.5,121 104.5,121.1 2.5,122 4.5,122 6.5,122 103.5,122.1 105.5,122.1 107.5,122.1 1.5,123.5 3.5,123.5 5.5,123.5 104.5,123.6 106.5,123.6 108.5,123.6
GND8: CN8_1.2 CN8_2.2
  other v1: 1.5,126.5 3.5,126.5 5.5,126.5 104.5,126.6 106.5,126.6 108.5,126.6 2.5,128 4.5,128 6.5,128 103.5,128.1 105.5,128.1 107.5,128.1 5.5,129 104.5,129.1 6.5,130 103.5,130.1 6.5,135 103.5,135.1 5.5,136 104.5,136.1 2.5,137 4.5,137 6.5,137 103.5,137.1 105.5,137.1 107.5,137.1 1.5,138.5 3.5,138.5 5.5,138.5 104.5,138.6 106.5,138.6 108.5,138.6
GND9: CN9_1.2 CN9_2.2 CN9_3.2 CN9_4.2 | length 21
  Top Layer 1 w1.5: CN9_3.2@2.7,142.86 v1@7.96,142.86 ; CN9_1.2@2.7,158.04 v1@7.96,158.04 ; v1@102.04,142.96 CN9_4.2@107.3,142.96 ; v1@102.04,158.14 CN9_2.2@107.3,158.14
  other v1: 6,142.82 7,142.82 8,142.82 102,142.92 103,142.92 104,142.92 1,149.75 3,149.75 5,149.75 105.1,149.85 107.1,149.85 109.1,149.85 2,150.5 4,150.5 106.1,150.6 108.1,150.6 1,151.25 3,151.25 5,151.25 105.1,151.35 107.1,151.35 109.1,151.35 6,158 7,158 8,158 102,158.1 103,158.1 104,158.1
GND10: CN10_1.2 CN10_2.2 CN10_3.2 CN10_4.2
  other v1: 1.5,161 4,161 106,161 108.5,161 9.65,161.121 12.65,161.121 15.65,161.121 18.65,161.121 21.65,161.121 24.65,161.121 27.65,161.121 30.65,161.121 33.65,161.121 36.65,161.121 39.65,161.121 42.65,161.121 45.65,161.121 48.65,161.121 51.65,161.121 54.65,161.121 57.65,161.121 60.65,161.121 63.65,161.121 66.65,161.121 69.65,161.121 72.65,161.121 75.65,161.121 78.65,161.121 81.65,161.121 84.65,161.121 87.65,161.121 90.65,161.121 93.65,161.121 96.65,161.121 99.65,161.121 7.25,161.25 102.75,161.25 6,162 104,162 7.25,163.25 102.75,163.25 6,164 104,164 11.15,164.121 14.15,164.121 17.15,164.121 20.15,164.121 23.15,164.121 26.15,164.121 29.15,164.121 32.15,164.121 35.15,164.121 38.15,164.121 41.15,164.121 44.15,164.121 47.15,164.121 50.15,164.121 53.15,164.121 56.15,164.121 59.15,164.121 62.15,164.121 65.15,164.121 68.15,164.121 71.15,164.121 74.15,164.121 77.15,164.121 80.15,164.121 83.15,164.121 86.15,164.121 89.15,164.121 92.15,164.121 95.15,164.121 98.15,164.121 101.15,164.121 104,165.5 5.85,165.65 7.1,166.4 103,166.5 12.65,167.121 15.65,167.121 18.65,167.121 21.65,167.121 24.65,167.121 27.65,167.121 30.65,167.121 33.65,167.121 36.65,167.121 39.65,167.121 42.65,167.121 45.65,167.121 48.65,167.121 51.65,167.121 54.65,167.121 57.65,167.121 60.65,167.121 63.65,167.121 66.65,167.121 69.65,167.121 72.65,167.121 75.65,167.121 78.65,167.121 81.65,167.121 84.65,167.121 87.65,167.121 90.65,167.121 93.65,167.121 96.65,167.121 99.65,167.121 8.35,167.15 101.75,167.25 7.1,167.9 103,168 8.35,168.65 101.75,168.75 7.1,169.4 103,169.5 1.5,170.5 4,170.5 106,170.5 108.5,170.5 8.35,171.65 101.75,171.75 7.1,172.4 103,172.5 12.65,173.121 15.65,173.121 18.65,173.121 21.65,173.121 24.65,173.121 27.65,173.121 30.65,173.121 33.65,173.121 36.65,173.121 39.65,173.121 42.65,173.121 45.65,173.121 48.65,173.121 51.65,173.121 54.65,173.121 57.65,173.121 60.65,173.121 63.65,173.121 66.65,173.121 69.65,173.121 72.65,173.121 75.65,173.121 78.65,173.121 81.65,173.121 84.65,173.121 87.65,173.121 90.65,173.121 93.65,173.121 96.65,173.121 99.65,173.121 8.35,173.15 101.75,173.25 7.1,173.9 103,174 104,175.5 6,176 11.15,176.121 14.15,176.121 17.15,176.121 20.15,176.121 23.15,176.121 26.15,176.121 29.15,176.121 32.15,176.121 35.15,176.121 38.15,176.121 41.15,176.121 44.15,176.121 47.15,176.121 50.15,176.121 53.15,176.121 56.15,176.121 59.15,176.121 62.15,176.121 65.15,176.121 68.15,176.121 71.15,176.121 74.15,176.121 77.15,176.121 80.15,176.121 83.15,176.121 86.15,176.121 89.15,176.121 92.15,176.121 95.15,176.121 98.15,176.121 101.15,176.121 7.25,176.75 102.75,176.75 6,177.5 104,177.5 7.25,178.25 102.75,178.25 6,179 104,179
GND11: CN11_1.2 CN11_2.2 CN11_3.2 CN11_4.2 | length 21
  Top Layer 1 w1.5: CN11_3.2@2.7,182.86 v1@7.96,182.86 ; CN11_1.2@2.7,198.04 v1@7.96,198.04 ; v1@102.04,182.86 CN11_4.2@107.3,182.86 ; v1@102.04,198.04 CN11_2.2@107.3,198.04
  other v1: 6,182.82 7,182.82 8,182.82 102,182.82 103,182.82 104,182.82 1,189.75 3,189.75 5,189.75 105.1,189.85 107.1,189.85 109.1,189.85 2,190.5 4,190.5 106.1,190.6 108.1,190.6 1,191.25 3,191.25 5,191.25 105.1,191.35 107.1,191.35 109.1,191.35 6,198 7,198 8,198 102,198 103,198 104,198
GND12: CN12_1.2 CN12_2.2 CN12_3.2 CN12_4.2 | length 21
  Top Layer 1 w1.5: CN12_3.2@2.7,202.86 v1@7.96,202.86 ; CN12_1.2@2.7,218.04 v1@7.96,218.04 ; v1@102.04,202.86 CN12_4.2@107.3,202.86 ; v1@102.04,218.04 CN12_2.2@107.3,218.04
  other v1: 6,202.82 7,202.82 8,202.82 102,202.82 103,202.82 104,202.82 30.937,209.675 79.2,209.675 1,209.75 3,209.75 5,209.75 105.1,209.85 107.1,209.85 109.1,209.85 2,210.5 4,210.5 106.1,210.6 108.1,210.6 1,211.25 3,211.25 5,211.25 30.937,211.325 79.2,211.325 105.1,211.35 107.1,211.35 109.1,211.35 6,218 7,218 8,218 102,218 103,218 104,218
GND13: CN13_1.2 CN13_2.2 CN13_3.2 CN13_4.2 | length 21
  Top Layer 1 w1.5: CN13_3.2@2.7,222.86 v1@7.96,222.86 ; CN13_1.2@2.7,238.04 v1@7.96,238.04 ; v1@102.04,222.86 CN13_4.2@107.3,222.86 ; v1@102.04,238.04 CN13_2.2@107.3,238.04
  other v1: 6,222.82 7,222.82 8,222.82 102,222.82 103,222.82 104,222.82 1,229.75 3,229.75 5,229.75 105.1,229.85 107.1,229.85 109.1,229.85 2,230.5 4,230.5 106.1,230.6 108.1,230.6 1,231.25 3,231.25 5,231.25 105.1,231.35 107.1,231.35 109.1,231.35 6,238 7,238 8,238 102,238 103,238 104,238
GND14: CN14_1.2 CN14_2.2 CN14_3.2 CN14_4.2 | length 21
  Top Layer 1 w1.5: CN14_3.2@2.7,242.86 v1@7.96,242.86 ; CN14_1.2@2.7,258.04 v1@7.96,258.04 ; v1@102.14,242.96 CN14_4.2@107.4,242.96 ; v1@102.14,258.14 CN14_2.2@107.4,258.14
  other v1: 6,242.82 7,242.82 8,242.82 102.1,242.92 103.1,242.92 104.1,242.92 1,249.75 3,249.75 5,249.75 105.1,249.85 107.1,249.85 109.1,249.85 2,250.5 4,250.5 106.1,250.6 108.1,250.6 1,251.25 3,251.25 5,251.25 105.1,251.35 107.1,251.35 109.1,251.35 6,258 7,258 8,258 102.1,258.1 103.1,258.1 104.1,258.1
MICROSTRIP_50OHMS: CN1_1.1 CN1_2.1 | length 104.8
  Top Layer 1 w0.35: CN1_1.1 CN1_2.1
MICROSTRIP_50OHMS_GND_DESC: CN8_1.1 CN8_2.1 | length 104.8
  Top Layer 1 w0.35: CN8_1.1 CN8_2.1
MICROSTRIP_50OHMS_VIAS: CN6_1.1 CN6_2.1 | length 104.8
  Top Layer 1 w0.35: CN6_1.1 v2(30,102.5) ; v2(80,102.5) CN6_2.1
  Signal w0.3: v2(30,102.5) v2(80,102.5)
MICROSTRIP_50OHMS_VIAS_RP: CN7_1.1 CN7_2.1 | length 104.8
  Top Layer 1 w0.35: CN7_1.1 v2(30,117.5) ; v2(80,117.5) CN7_2.1
  Signal w0.3: v2(30,117.5) v2(80,117.5)
MICROSTRIP_90OHMS_GND_DESC_N: CN14_3.1 CN14_4.1 | length 111.8
  Top Layer 1 w0.2: CN14_3.1 3.95,245.5 6,247.55 6,250.218 6.117,250.335 102.565,250.335 103.883,250.335 104,250.218 104,247.65 106.15,245.5 CN14_4.1
MICROSTRIP_90OHMS_GND_DESC_P: CN14_1.1 CN14_2.1 | length 111.8
  Top Layer 1 w0.2: CN14_1.1 3.95,255.5 6,253.45 6,250.782 6.117,250.665 102.702,250.665 103.883,250.665 104,250.782 104,253.35 106.15,255.5 CN14_2.1
MICROSTRIP_90OHMS_N: CN9_3.1 CN9_4.1 | length 111.8
  Top Layer 1 w0.2: CN9_3.1 3.95,145.5 6,147.55 6,150.218 6.117,150.335 102.565,150.335 103.883,150.335 104,150.218 104,147.65 106.15,145.5 CN9_4.1
MICROSTRIP_90OHMS_P: CN9_1.1 CN9_2.1 | length 111.8
  Top Layer 1 w0.2: CN9_1.1 3.95,155.5 6,153.45 6,150.782 6.117,150.665 102.702,150.665 103.883,150.665 104,150.782 104,153.35 106.15,155.5 CN9_2.1
MICROSTRIP_90OHMS_SKEW_N: CN13_3.1 CN13_4.1 | length 117
  Top Layer 1 w0.2: CN13_3.1 3.95,225.5 6,227.55 6,230.218 6.117,230.335 30.229,230.335 32.464,228.1 34.168,228.1 35.892,229.825 39.149,229.825 40.674,228.3 42.778,228.3 44.403,229.925 64.28,229.925 65.555,228.65 68.358,228.65 69.583,229.875 72.74,229.875 73.965,228.65 76.768,228.65 78.453,230.335 102.565,230.335 103.883,230.335 104,230.218 104,227.65 106.15,225.5 CN13_4.1
MICROSTRIP_90OHMS_SKEW_P: CN13_1.1 CN13_2.1 | length 111.8
  Top Layer 1 w0.2: CN13_1.1 3.95,235.5 6,233.45 6,230.782 6.117,230.665 102.702,230.665 103.883,230.665 104,230.782 104,233.35 106.15,235.5 CN13_2.1
MICROSTRIP_90OHMS_VIAS_N: CN11_3.1 CN11_4.1 | length 112.4
  Top Layer 1 w0.2: CN11_3.1 3.35,186.15 4.65,186.15 6,187.5 6,190.218 6.117,190.335 29.77,190.335 30.055,190.05 v2(30.137,190.05) ; v2(80,190.05) 80.285,190.335 103.883,190.335 104,190.218 104,187.5 105.35,186.15 106.75,186.15 CN11_4.1
  Signal w0.15: v2(30.137,190.05) 30.185,190.05 30.5,190.365 79.637,190.365 79.952,190.05 v2(80,190.05)
MICROSTRIP_90OHMS_VIAS_P: CN11_1.1 CN11_2.1 | length 112.4
  Top Layer 1 w0.2: CN11_1.1 3.35,194.85 4.65,194.85 6,193.5 6,190.782 6.117,190.665 29.77,190.665 30.055,190.95 v2(30.137,190.95) ; v2(80,190.95) 80.285,190.665 103.883,190.665 104,190.782 104,193.5 105.35,194.85 106.75,194.85 CN11_2.1
  Signal w0.15: v2(30.137,190.95) 30.185,190.95 30.5,190.635 79.637,190.635 v2@79.976,190.974
MICROSTRIP_90OHMS_VIAS_RP_N: CN12_3.1 CN12_4.1 | length 112.4
  Top Layer 1 w0.2: CN12_3.1 3.35,206.15 4.65,206.15 6,207.5 6,210.218 6.117,210.335 29.77,210.335 30.055,210.05 v2(30.137,210.05) ; v2(80,210.05) 80.082,210.05 80.367,210.335 103.883,210.335 104,210.218 104,207.5 105.35,206.15 106.75,206.15 CN12_4.1
  Signal w0.15: v2(30.137,210.05) 30.185,210.05 30.5,210.365 79.637,210.365 79.952,210.05 v2(80,210.05)
MICROSTRIP_90OHMS_VIAS_RP_P: CN12_1.1 CN12_2.1 | length 112.4
  Top Layer 1 w0.2: CN12_1.1 3.35,214.85 4.65,214.85 6,213.5 6,210.782 6.117,210.665 29.77,210.665 30.055,210.95 v2(30.137,210.95) ; v2(80,210.95) 80.082,210.95 80.367,210.665 103.883,210.665 104,210.782 104,213.5 105.35,214.85 106.75,214.85 CN12_2.1
  Signal w0.15: v2(30.137,210.95) 30.185,210.95 30.5,210.635 79.637,210.635 79.952,210.95 v2(80,210.95)
NetC1_2: C1.2 C3.2 C5.1 | length 4
  Top Layer 1 w0.285: C1.2 C3.2@94.5,65 ; C3.2 C3.2@94.5,65 ; C5.1 C3.2@94.5,65
NetC2_2: C2.2 C4.2 C6.1 | length 4
  Top Layer 1 w0.21: C2.2 C4.2@94.5,85 ; C4.2 C4.2@94.5,85 ; C6.1 C4.2@94.5,85
NetC5_2: C5.2 C7.2 CN4_2.1 | length 10
  Top Layer 1 w0.285: C5.2 C7.2@99.5,65 ; C7.2 99.5,64.95 C7.2@99.525,64.975 ; C7.2@99.525,65 CN4_2.1
NetC6_2: C6.2 C8.2 CN5_2.1 | length 10.1
  Top Layer 1 w0.21: C6.2 C8.2@99.5,85 ; C8.2 C8.2@99.5,85 ; CN5_2.1 C8.2@99.5,85

## Polygon pours and split planes (outlines as drawn)
GND5 on GND1 "GND5_L02_P010" (solid, remove dead copper, pour order 10): 0,95 0,75 110,75 110,95
GND14 on GND1 "GND14_L02_P070" (solid, remove dead copper, pour order 70): 0,260 0,240 110,240 110,260
GND6 on GND1 "GND6_L02_P011" (solid, remove dead copper, pour order 11): 0,110 0,95 110,95 110,110
GND13 on GND1 "GND13_L02_P018" (solid, remove dead copper, pour order 18): 0,240 0,220 110,220 110,240
GND1 on GND1 "GND1_L02_P000" (solid, remove dead copper, pour order 0): 0,15 0,0 110,0 110,15
GND2 on GND1 "GND2_L02_P006" (solid, remove dead copper, pour order 6): 0,35 0,15 110,15 110,35
GND3 on GND1 "GND3_L02_P008" (solid, remove dead copper, pour order 8): 0,55 0,35 110,35 110,55
GND4 on GND1 "GND4_L02_P009" (solid, remove dead copper, pour order 9): 0,75 0,55 110,55 110,75
GND7 on GND1 "GND7_L02_P012" (solid, remove dead copper, pour order 12): 0,125 0,110 110,110 110,125
GND8 on GND1 "GND8_L02_P013" (solid, remove dead copper, pour order 13): 0,140 0,125 110,125 110,140
GND9 on GND1 "GND9_L02_P014" (solid, remove dead copper, pour order 14): 0,160 0,140 110,140 110,160
GND10 on GND1 "GND10_L02_P015" (solid, remove dead copper, pour order 15): 0,180 0,160 110,160 110,180
GND11 on GND1 "GND11_L02_P016" (solid, remove dead copper, pour order 16): 0,200 0,180 110,180 110,200
GND12 on GND1 "GND12_L02_P017" (solid, remove dead copper, pour order 17): 0,220 0,200 110,200 110,220
GND5 on Bottom Layer 1 "GND5_L04_P024" (solid, remove dead copper, pour order 24): 0,95 0,75 110,75 110,95
GND14 on Bottom Layer 1 "GND14_L04_P065" (solid, remove dead copper, pour order 65): 0,260 0,240 110,240 110,260
GND6 on Bottom Layer 1 "GND6_L04_P025" (solid, remove dead copper, pour order 25): 0,110 0,95 110,95 110,110
GND2 on Bottom Layer 1 "GND2_L04_P021" (solid, remove dead copper, pour order 21): 0,35 0,15 110,15 110,35
GND13 on Bottom Layer 1 "GND13_L04_P032" (solid, remove dead copper, pour order 32): 0,240 0,220 110,220 110,240
GND12 on Bottom Layer 1 "GND12_L04_P031" (solid, remove dead copper, pour order 31): 0,220 0,200 110,200 110,220
GND11 on Bottom Layer 1 "GND11_L04_P030" (solid, remove dead copper, pour order 30): 0,200 0,180 110,180 110,200
GND10 on Bottom Layer 1 "GND10_L04_P029" (solid, remove dead copper, pour order 29): 0,180 0,160 110,160 110,180
GND9 on Bottom Layer 1 "GND9_L04_P028" (solid, remove dead copper, pour order 28): 0,160 0,140 110,140 110,160
GND8 on Bottom Layer 1 "GND8_L04_P027" (solid, remove dead copper, pour order 27): 0,140 0,125 110,125 110,140
GND7 on Bottom Layer 1 "GND7_L04_P026" (solid, remove dead copper, pour order 26): 0,125 0,110 110,110 110,125
GND4 on Bottom Layer 1 "GND4_L04_P023" (solid, remove dead copper, pour order 23): 0,75 0,55 110,55 110,75
GND3 on Bottom Layer 1 "GND3_L04_P022" (solid, remove dead copper, pour order 22): 0,55 0,35 110,35 110,55
GND1 on Bottom Layer 1 "GND1_L04_P019" (solid, remove dead copper, pour order 19): 0,15 0,0 110,0 110,15
GND5 on Top Layer 1 "GND5_L01_P035" (solid, remove dead copper, pour order 35): 0,95 0,75 110,75 110,95
GND14 on Top Layer 1 "GND14_L01_P071" (solid, remove dead copper, pour order 71): 110.1,253.6 105.1,253.6 104.6,253.1 104.6,248.1 105.1,247.6 110.1,247.6
GND14 on Top Layer 1 "GND14_L01_P068" (solid, remove dead copper, pour order 68): 0,253.5 5,253.5 5.5,253 5.5,248 5,247.5 0,247.5
GND13 on Top Layer 1 "GND13_L01_P063" (solid, remove dead copper, pour order 63): 0,233.5 5,233.5 5.5,233 5.5,228 5,227.5 0,227.5
GND12 on Top Layer 1 "GND12_L01_P061" (solid, remove dead copper, pour order 61): 110.1,213.6 105.1,213.6 104.6,213.1 104.6,208.1 105.1,207.6 110.1,207.6
GND11 on Top Layer 1 "GND11_L01_P060" (solid, remove dead copper, pour order 60): 110.1,193.6 105.1,193.6 104.6,193.1 104.6,188.1 105.1,187.6 110.1,187.6
GND11 on Top Layer 1 "GND11_L01_P058" (solid, remove dead copper, pour order 58): 0,193.5 5,193.5 5.5,193 5.5,188 5,187.5 0,187.5
GND10 on Top Layer 1 "GND10_L01_P036" (solid, remove dead copper, pour order 36): 0,180 0,160 110,160 110,180
GND13 on Top Layer 1 "GND13_L01_P064" (solid, remove dead copper, pour order 64): 110.1,233.6 105.1,233.6 104.6,233.1 104.6,228.1 105.1,227.6 110.1,227.6
GND12 on Top Layer 1 "GND12_L01_P062" (solid, remove dead copper, pour order 62): 0,213.5 5,213.5 5.5,213 5.5,208 5,207.5 0,207.5
GND9 on Top Layer 1 "GND9_L01_P057" (solid, remove dead copper, pour order 57): 110.1,153.6 105.1,153.6 104.6,153.1 104.6,148.1 105.1,147.6 110.1,147.6
GND9 on Top Layer 1 "GND9_L01_P056" (solid, remove dead copper, pour order 56): 0,153.5 5,153.5 5.5,153 5.5,148 5,147.5 0,147.5
GND8 on Top Layer 1 "GND8_L01_P055" (solid, remove dead copper, pour order 55): 110,125.1 103,125.1 103,130.6 110,130.6
GND8 on Top Layer 1 "GND8_L01_P054" (solid, remove dead copper, pour order 54): 110,140.1 103,140.1 103,134.6 110,134.6
GND7 on Top Layer 1 "GND7_L01_P053" (solid, remove dead copper, pour order 53): 110,110.1 103,110.1 103,115.6 110,115.6
GND7 on Top Layer 1 "GND7_L01_P052" (solid, remove dead copper, pour order 52): 110,125.1 103,125.1 103,119.6 110,119.6
GND6 on Top Layer 1 "GND6_L01_P051" (solid, remove dead copper, pour order 51): 110,95.1 103,95.1 103,100.6 110,100.6
GND6 on Top Layer 1 "GND6_L01_P050" (solid, remove dead copper, pour order 50): 110,110.1 103,110.1 103,104.6 110,104.6
GND8 on Top Layer 1 "GND8_L01_P049" (solid, remove dead copper, pour order 49): 0,125 7,125 7,130.5 0,130.5
GND8 on Top Layer 1 "GND8_L01_P048" (solid, remove dead copper, pour order 48): 0,140 7,140 7,134.5 0,134.5
GND7 on Top Layer 1 "GND7_L01_P047" (solid, remove dead copper, pour order 47): 0,110 7,110 7,115.5 0,115.5
GND7 on Top Layer 1 "GND7_L01_P046" (solid, remove dead copper, pour order 46): 0,125 7,125 7,119.5 0,119.5
GND6 on Top Layer 1 "GND6_L01_P045" (solid, remove dead copper, pour order 45): 0,95 7,95 7,100.5 0,100.5
GND6 on Top Layer 1 "GND6_L01_P044" (solid, remove dead copper, pour order 44): 0,110 7,110 7,104.5 0,104.5
GND1 on Top Layer 1 "GND1_L01_P043" (solid, remove dead copper, pour order 43): 110,0 103,0 103,5.5 110,5.5
GND1 on Top Layer 1 "GND1_L01_P042" (solid, remove dead copper, pour order 42): 110,15 103,15 103,9.5 110,9.5
GND1 on Top Layer 1 "GND1_L01_P041" (solid, remove dead copper, pour order 41): 0,0 7,0 7,5.5 0,5.5
GND1 on Top Layer 1 "GND1_L01_P040" (solid, remove dead copper, pour order 40): 0,15 7,15 7,9.5 0,9.5
GND4 on Top Layer 1 "GND4_L01_P034" (solid, remove dead copper, pour order 34): 0,75 0,55 110,55 110,75
GND2 on Top Layer 1 "GND2_L01_P020" (solid, remove dead copper, pour order 20): 0,35 0,15 110,15 110,35
GND3 on Top Layer 1 "GND3_L01_P033" (solid, remove dead copper, pour order 33): 0,55 0,35 110,35 110,55

## Keep-outs
Keep-Out Layer:
  lines w0.2: 0,15 110,15 ; 0,35 110,35 ; 0,55 110,55 ; 0,75 110,75 ; 0,95 110,95 ; 0,110 110,110 ; 0,125 110,125 ; 0,140 110,140 ; 0,160 110,160 ; 0,180 110,180 ; 0,200 110,200 ; 0,220 110,220 ; 0,240 110,240 ; 0,0 0,260 110,260 110,0 0,0

## Other copper
GND1:
  pour cut-out: 54,258 54,242 55.9,242 55.9,258
  pour cut-out: 54,138 54,127 55.9,127 55.9,138

## Silkscreen, mask and mechanical layers (free items; w line width, h text height)
Top Overlay:
  text "14 - MICROSTRIP 90Ω + GND DESC. (L2) 4L [W200 G130]" at 0,256.5 h2.5
  text "13 - MICROSTRIP 90Ω + SKEW 4L [W200 G130]" at 0,236.5 h2.5
  text "12 - MICROSTRIP 90Ω + VIAS + RETURN PATH 4L [W200 G130 / W150 G120]" at 0,216.5 h2.5
  text "11 - MICROSTRIP 90Ω + VIAS 4L [W200 G130 / W150 G120]" at 0,196.5 h2.5
  text "10 - CPW DP 90Ω 4L [W160 G130 GG127]" at 0,176.5 h2.5
  text "9 - MICROSTRIP DP 90Ω BASELINE 4L [W200 G130]" at 0,156.5 h2.5
  text "8 - MICROSTRIP 50Ω GND DESC.(L2) 4L [W350]" at 0,136.5 h2.5
  text "7 - MICROSTRIP 50Ω + VIAS + RETURN PATH 4L  [W350/W300]" at 0,121.5 h2.5
  text "6 - MICROSTRIP 50Ω + VIAS 4L  [W350/W300]" at 0,106.5 h2.5
  text "5 - CPW 50Ω + MATCHING 4L [W210 G120]" at 0,91.5 h2.5
  text "4 - CPW 50Ω + MATCHING 4L [W285 G200]" at 0,71.5 h2.5
  text "3 - CPW 50Ω 4L [W210 G120]" at 0,51.5 h2.5
  text "2 - CPW 50Ω 4L [W285 G200]" at 0,31.5 h2.5
  text "1 - MICROSTRIP 50Ω BASELINE 4L [W350]" at 0,11.5 h2.5
Referencias:
  circle w0.254: c78.5,65.5 r3
  circle w0.254: c9.5,65.5 r5
  circle w0.254: c78.5,9.5 r5
  circle w0.254: c9.5,9.5 r5
  circle w0.254: c78.5,65.5 r5
  circle w0.254: c9.5,65.5 r3
  circle w0.254: c9.5,9.5 r3
  circle w0.254: c78.5,9.5 r3
  lines w0.1: 83.3,7 83.3,68.091 ; 3,16 ccw(c15.988,15.988) 15.976,3 74.024,3 ccw(c74.012,15.988) 87,16 87,59 ccw(c74.012,59.012) 74.024,72 15.976,72 ccw(c15.988,59.012) 3,59 3,16

## Dimensions
0,260 to 0,0 on Dimensions
0,0 to 110,0 on Dimensions